# Altium PCB design4.PcbDoc
Units mm, origin at the board's own origin, x right, y up, seen from the top; angles counter-clockwise.
Board outline 22 x 100 mm, 2 copper layers (Top Layer, Bottom Layer); 53 components, 36 nets, 172 pads, 153 vias.
Unrouted connection lines stored in the file: 1.
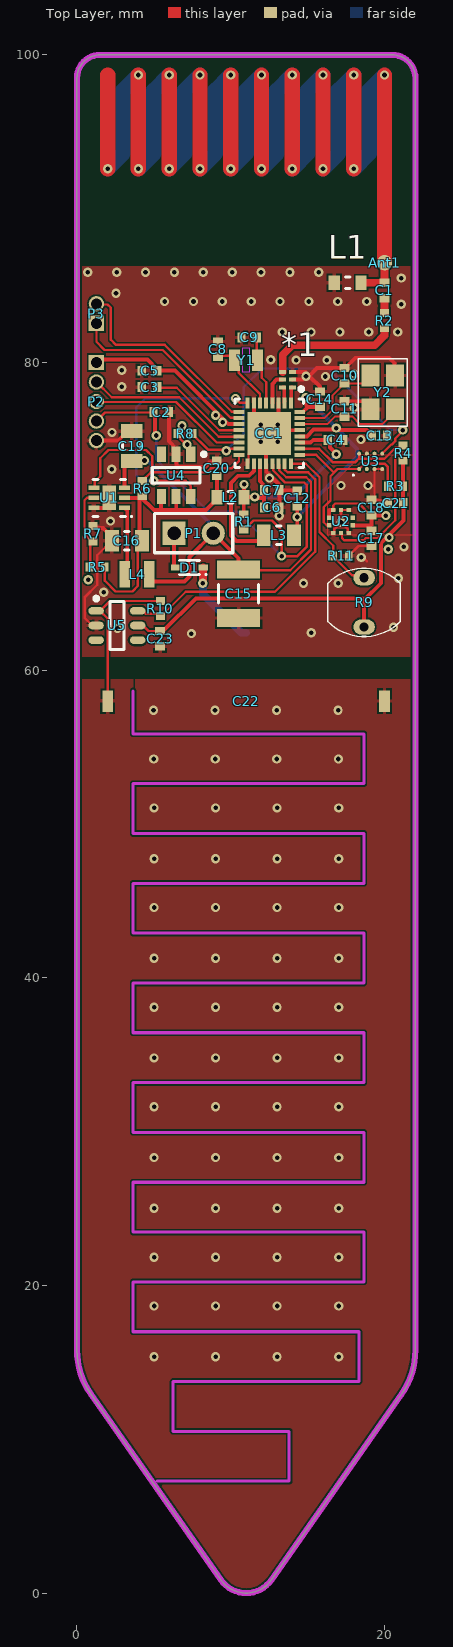
[diagram p0: Top Layer view]
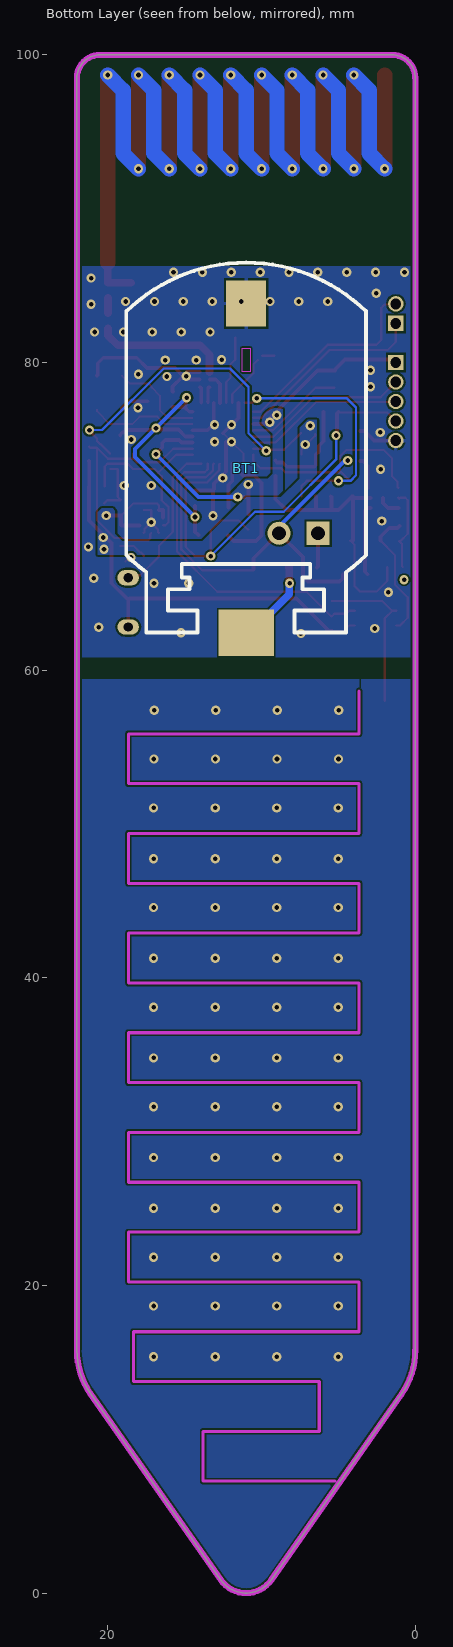
[diagram p1: Bottom Layer view, seen from below]
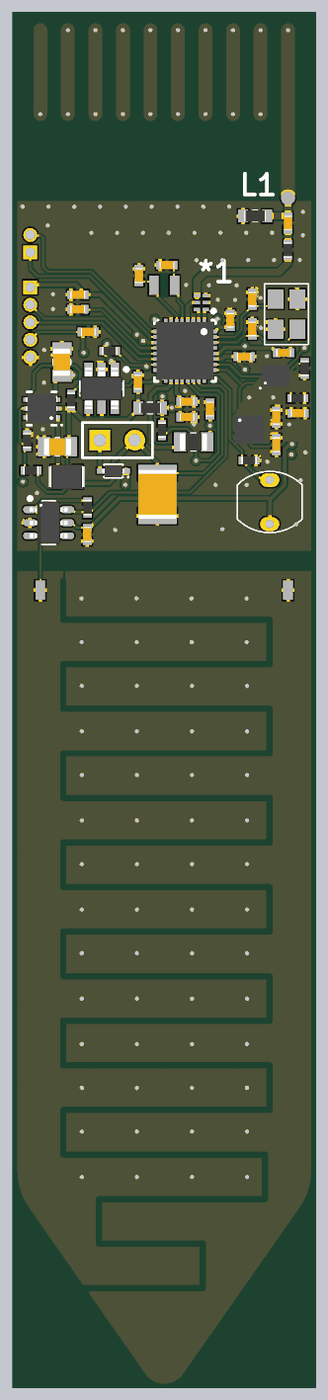
[diagram p2: 3D render of the assembled board from above, using the file's embedded part models]

## Layer stack, top to bottom
Top Solder: solder mask 0.0102, Solder Resist, Dk 3.5
Top Layer: signal copper 0.0356
Dielectric 1: dielectric 0.32, FR-4, Dk 4.8
Bottom Layer: signal copper 0.0356
Bottom Solder: solder mask 0.0102, Solder Resist, Dk 3.5

## Board outline
0.911,12.938 cw(c5.006,15.806) 0.006,15.806 0.006,98.506 cw(c1.506,98.506) 1.506,100.006 20.506,100.006 cw(c20.506,98.506) 22.006,98.506 22.006,15.806 cw(c17.006,15.806) 21.102,12.938 12.645,0.859 cw(c11.006,2.006) 9.368,0.859

## Design rules (kind name [scope] priority, off if disabled: settings)
Clearance [All] p1: gap=0.127 ignorepadtopadclearanceinfootprint=FALSE
DiffPairsRouting [All] p1: maxlimit=0.127 minlimit=0.127 mostfreqgap=0.127 toplayer_minwidth=0.218 toplayer_maxwidth=0.218 toplayer_prefwidth=0.218 bottomlayer_minwidth=0.218 bottomlayer_maxwidth=0.218 bottomlayer_prefwidth=0.218 maxuncoupledlength=12.7
Height Height_1 [InComponent('U2')] p1: minheight=0 maxheight=100 prefheight=12.7
Height [All] p2: minheight=0 maxheight=25.4 prefheight=12.7
HoleSize [All] p1: absolutevalues=TRUE maxlimit=2.54 minlimit=0.3 maxpercent=80.000 minpercent=20.000
MinimumSolderMaskSliver [All] p1: minsoldermaskwidth=0.127
PlaneClearance [All] p1: clearance=0.127
PlaneConnect [All] p1: planeconnectstyle=Direct reliefexpansion=0.508 reliefentries=4 reliefconductorwidth=0.254 reliefairgap=0.254
PolygonConnect [All] p1: thpad.connectstyle=Relief thpad.reliefconductorwidth=0.254 thpad.reliefentries=4 thpad.polygonreliefangle="90 Angle" thpad.airgapwidth=0.127 smdpad.connectstyle=Relief smdpad.reliefconductorwidth=0.254 smdpad.reliefentries=4 smdpad.polygonreliefangle="90 Angle" smdpad.airgapwidth=0.127 via.connectstyle=Direct via.reliefconductorwidth=0.254 via.reliefentries=4 via.polygonreliefangle="90 Angle" via.airgapwidth=0.254
RoutingVias [All] p1: holewidth=0.4 width=0.7 viastyle="Through Hole" minholewidth=0.3 minwidth=0.6 maxholewidth=0.5 maxwidth=0.8
SolderMaskExpansion [All] p1: expansion=0.127
Width Width_50ohm [InNet('Net*1_1') OR InNet('NetAnt1_1')] p1: maxlimit=1.27 minlimit=0.508 preferedwidth=0.508 minimp=50.000000 maximp=50.000000 favimp=50.000000
Width [All] p2: maxlimit=0.254 minlimit=0.127 preferedwidth=0.152 minimp=50.000000 maximp=50.000000 favimp=50.000000
24 further rules are at their usual default settings.

## Classes and differential pairs
differential pair RF: +RF_P -RF_N

## Components (designator, comment, footprint, x,y, rotation, side; value= is the part's Value field where it differs from the comment)
*1 "0850BM14E0016" 0850BM14E0016 14.021,78.392 r90 top
Ant1 "Antenna 868 Helix" ANTENNA_868_HELIX 20,86.5 r180 top locked
BT1 "Battery Coin Cell" S8421-45R 10.998,64 r180 bottom
C1 "Cap" "0402 (CAP)" 19.99,84.692 r90 top value=8.2pF
C2 "Cap" "0402 (CAP)" 5.486,76.784 r0 top value=100nF
C3 "Cap" "0402 (CAP)" 4.724,78.41 r0 top value=1uF
C4 "Cap" "0402 (CAP)" 16.815,74.981 r180 top value=100nF
C5 "Cap" "0402 (CAP)" 4.724,79.477 r0 top value=100nF
C6 "Cap" "0402 (CAP)" 12.662,70.591 r180 top value=22uF
C7 "Cap" "0402 (CAP)" 12.662,71.709 r180 top value=100nF
C8 "Cap" "0402 (CAP)" 9.169,80.874 r270 top value=12pF
C9 "Cap" "0402 (CAP)" 11.201,81.636 r0 top value=12pF
C10 "DNM" "0402 (CAP)" 17.399,79.146 r270 top value=12pF
C11 "DNM" "0402 (CAP)" 17.399,76.987 r270 top value=12pF
C12 "Cap" "0402 (CAP)" 14.326,71.171 r270 top value=22uF
C13 "Cap" "0402 (CAP)" 19.685,75.26 r180 top value=100nF
C14 "Cap" "0402 (CAP)" 15.799,77.622 r270 top value=100nF
C15 "GRM32EC70J107ME15L" "1210 (CAP)" 10.516,64.973 r90 top value=100uF
C16 "Cap" "0805 (CAP)" 3.251,68.428 r0 top value=22uF
C17 "Cap" "0402 (CAP)" 19.152,68.58 r90 top value=100nF
C18 "Cap" "0402 (CAP)" 19.152,70.579 r270 top value=100nF
C19 "Cap" "0805 (CAP)" 3.556,74.574 r270 top value=10uF
C20 "Cap" "0402 (CAP)" 9.093,73.127 r270 top value=1uF
C21 "Cap" "0402 (CAP)" 20.721,70.866 r0 top value=100nF
C22 "Chumidity" SOIL_CAP 11,17 r0 top locked value=1pF
C23 "Cap" "0402 (CAP)" 5.41,62.052 r90 top value=100nF
CC1 "CC1310F32RSMR" CC1310F32RSMR 12.506,75.406 r270 top
D1 "RB751S40T5G" SOD-523 7.315,66.675 r180 top
L1 "Inductor" "0603 (IND)" 17.602,85.192 r180 top value=68nH
L2 "BLM18HE152SN1D" "0603 (IND)" 9.982,71.247 r0 top value="1500 Ohm"
L3 "MLZ2012N6R8LT000" "0805 (IND)" 13.132,68.783 r0 top value=6.8uH
L4 "Inductor" SRN2009T 3.912,66.243 r180 top value=3.3uH
P1 "Header 2" HDR1X2 6.325,68.91 r0 top
P2 "Header 5" 5pin-1.27 1.27,77.47 r270 top
P3 "Header 2" 2pin-1.27 1.27,83.185 r90 top
R1 "Res1" "0402 (RES)" 10.846,69.647 r90 top value=100K
R2 "" "0402 (RES)" 19.99,82.728 r90 top value=0
R3 "Res1" "0402 (RES)" 20.701,71.958 r0 top value=4.7K
R4 "Res1" "0402 (RES)" 21.209,74.117 r270 top value=4.7K
R5 "DNM" "0402 (RES)" 1.321,66.713 r180 top value=0
R6 "Res1" "0402 (RES)" 4.242,71.806 r90 top value=10K
R7 "DNM" "0402 (RES)" 1.041,68.877 r90 top value=0
R8 "Res1" "0402 (RES)" 7.036,75.387 r0 top value=4.7K
R9 "200K - 10K" Photoresistor 18.669,64.414 r90 top
R10 "Rcharge" "0402 (RES)" 5.43,64.008 r270 top value=1k
R11 "Res1" "0402 (RES)" 17.17,67.437 r180 top value=4.7K
U1 "TPS61291" TPS61291 2.1,71.206 r180 top
U2 "BMP388, Pressure sensor" BMP388 17.17,69.672 r90 top
U3 "HDC1010, Humidity, Temp" HDC1010 19.101,73.584 r90 top
U4 "TPS22860" SOT23-5 6.452,72.669 r270 top
U5 "74LVC2G14, Inverting Schmitt Trigger" 74LVC2G14 2.603,62.912 r0 top
Y1 "32.768 kHz" "FC-12M 32.7680KA-A3" 10.998,80.162 r0 top
Y2 "TSX-3225 24.0000MF20G-AC3" "TSX-3225 24.0000MF20G-AC3" 19.886,78.062 r270 top

## Footprints (in the part's own frame and the unit in brackets; to place one, negate y for a bottom-side part, rotate by r counter-clockwise, add the part's x,y. Pads: shape width x height; smd on the part's side, far side on the other; paste and mask are expansions set on the pad)
2pin-1.27 [mm]
  rect 1x1 hole 0.7: 1(-0.635,0)
  round 1 hole 0.7: 2(0.635,0)
5pin-1.27 [mm]
  rect 1x1 hole 0.7: 1(-2.54,0)
  round 1 hole 0.7: 2(-1.27,0) 3(0,0) 4(1.27,0) 5(2.54,0)
74LVC2G14 [mm] "TSOP, 6-Leads, Body 2,90x1,50mm, Pitch 0,95mm, IPC Medium Density"
  oval 1x0.5 smd: 1(-1.35,0.95) 2(-1.35,0) 3(-1.35,-0.95) 4(1.35,-0.95) 5(1.35,0) 6(1.35,0.95)
  silkscreen extent -1.47,-1.55 0.45,1.87, body extent -1.38,-1.55 1.38,1.55, height 1.1
"0402 (CAP)" [mm] "Chip Capacitor, 2-Leads, Body 1,60x0,80mm, IPC Medium Density"
  rect 0.54x0.64 smd: 1(-0.5,0) 2(0.5,0)
  body extent -0.55,-0.3 0.55,0.3, height 0.4
"0402 (RES)" [mm] "Chip Resistor, 2-Leads, Body 1,00x0,50mm, IPC Medium Density"
  rect 0.5x0.6 smd: 1(-0.5,0) 2(0.5,0)
  body extent -0.55,-0.3 0.55,0.3, height 0.4
"0603 (IND)" [mm]
  rect 0.72x0.94 smd: 1(-0.87,0) 2(0.87,0)
  silkscreen extent -0.15,-0.37 0.15,0.37, body extent -0.8,-0.4 0.8,0.4, height 0.6
"0805 (CAP)" [mm] "Chip Capacitor, 2-Leads, Body 2,00x1,25mm, IPC Medium Density"
  rect 0.9x1.4 smd: 1(-0.975,0) 2(0.975,0)
  silkscreen extent -0.15,-0.6 0.15,0.6, body extent -1,-0.63 1,0.63, height 0.6
"0805 (IND)" [mm] "Chip Inductor, 2-Leads, Body 2,00x1,25mm, IPC Medium Density"
  rect 0.9x1.39 smd: 1(-0.98,0) 2(0.98,0)
  silkscreen extent -0.15,-0.6 0.15,0.6, body extent -1,-0.63 1,0.63, height 0.6
0850BM14E0016 [mm]
  rect 0.25x0.45 smd: 1(1,0.65) 2(0.5,0.65) 3(0,0.65) 4(0,0) 5(0.5,0) 6(1,0)
"1210 (CAP)" [mm] "Chip Capacitor, 2-Leads, Body 3,20x2,50mm, IPC Medium Density"
  rect 1.15x2.8 smd: 1(-1.575,0) 2(1.575,0)
  silkscreen extent -0.6,-1.3 0.6,1.3, body extent -1.8,-1.4 1.8,1.4, height 2.8
ANTENNA_868_HELIX [mm]
  round 1 smd: 1(0,0)
  Top Layer lines w1: 18,-6.1 18,-12.2 ; 16,-6.1 16,-12.2 ; 14,-6.1 14,-12.2 ; 12,-6.1 12,-12.2 ; 10,-6.1 10,-12.2 ; 8,-6.1 8,-12.2 ; 6,-6.1 6,-12.2 ; 4,-6.1 4,-12.2 ; 2,-6.1 2,-12.2 ; 0,0 0,-12.2
  Bottom Layer lines w1: 18,-6.1 17,-7.1 17,-11.2 16,-12.2 ; 16,-6.1 15,-7.1 15,-11.2 14,-12.2 ; 14,-6.1 13,-7.1 13,-11.2 12,-12.2 ; 12,-6.1 11,-7.1 11,-11.2 10,-12.2 ; 10,-6.1 9,-7.1 9,-11.2 8,-12.2 ; 8,-6.1 7,-7.1 7,-11.2 6,-12.2 ; 6,-6.1 5,-7.1 5,-11.2 4,-12.2 ; 4,-6.1 3,-7.1 3,-11.2 2,-12.2 ; 2,-6.1 1,-7.1 1,-11.2 0,-12.2
BMP388 [mm] "LGA, 10-Leads, Body 2,00x2,00mmx0,80mm, Pitch 0,50mm"
  rect 0.275x0.275 smd: 1(0.25,0.762) 2(-0.25,0.762) 3(-0.75,0.5) 4(-0.75,0) 5(-0.75,-0.5) 6(-0.25,-0.763) 7(0.25,-0.763) 8(0.75,-0.5) 9(0.75,0) 10(0.75,0.5)
  body extent -1.02,-1.03 1.65,1.02, height 30
CC1310F32RSMR [mm] "QFN, 32-Leads, Body 4,00x4,00mm, Pitch 0,40mm, Thermal Pad 2,80x2,80mm, IPC Medium Density"
  rect 0.7x0.26 smd: 1(-1.975,1.4) 2(-1.975,1) 3(-1.975,0.6) 4(-1.975,0.2) 5(-1.975,-0.2) 6(-1.975,-0.6) 7(-1.975,-1) 8(-1.975,-1.4) 17(1.975,-1.4) 18(1.975,-1) 19(1.975,-0.6) 20(1.975,-0.2) 21(1.975,0.2) 22(1.975,0.6) 23(1.975,1) 24(1.975,1.4)
  rect 0.26x0.7 smd: 9(-1.4,-1.975) 10(-1,-1.975) 11(-0.6,-1.975) 12(-0.2,-1.975) 13(0.2,-1.975) 14(0.6,-1.975) 15(1,-1.975) 16(1.4,-1.975) 25(1.4,1.975) 26(1,1.975) 27(0.6,1.975) 28(0.2,1.975) 29(-0.2,1.975) 30(-0.6,1.975) 31(-1,1.975) 32(-1.4,1.975)
  rect 2.8x2.8 smd: 33(0,0)
  silkscreen extent -3,-2.22 2.22,2.22, body extent -2.08,-2.08 2.08,2.08, height 1
"FC-12M 32.7680KA-A3" [mm]
  rect 0.7x1.4 smd: 1(-0.75,0) 2(0.75,0)
  Keep-Out Layer region: -0.254,-0.762 0.254,-0.762 0.254,0.762 -0.254,0.762
HDC1010 [mm] "BGA, 8-Leads, Body 1,59x2,04mmx0,68mm, Pitch 0,50mm"
  round 0.26 smd: A1(-0.5,0.75) A2(0.5,0.75) B1(-0.5,0.25) B2(0.5,0.25) C1(-0.5,-0.25) C2(0.5,-0.25) D1(-0.5,-0.75) D2(0.5,-0.75)
  silkscreen extent -0.95,1.08 -0.85,1.17, body extent -0.79,-1.02 0.79,1.02, height 0.67
HDR1X2 [mm] "Connector; Header; 2 Position"
  rect 1.5x1.5 hole 0.9: 1(0,0)
  round 1.5 hole 0.9: 2(2.54,0)
  silkscreen extent -1.27,-1.27 3.81,1.27
Photoresistor [mm]
  oval 1x1.4 hole 0.6: 1(-1.6,0) 2(1.6,0)
  silkscreen extent -2.22,-2.35 2.22,2.35
S8421-45R [mm]
  rect 3.6x3 smd: 1(0,-1.556)
  rect 2.6x3 smd: 2(0,19.844)
  silkscreen extent -7.8,-1.56 7.8,22.5
SOD-523 [mm] "Molded Diode, 2-Leads, Body 1,20x0,80mm, IPC Medium Density"
  rect 0.6x0.4 smd: 1(-0.9,0) 2(0.9,0)
  silkscreen extent -1.12,-0.45 0.65,0.5, body extent -0.87,-0.45 0.87,0.45, height 0.7
SOIL_CAP [mm]
  rect 0.7x1.4 smd: 1(-9,41) 2(9,41)
  Keep-Out Layer lines w0.2: -7.339,41.656 -7.339,38.867 7.661,38.867 7.661,35.628 -7.339,35.628 -7.339,32.389 7.661,32.389 7.661,29.15 -7.339,29.15 -7.339,25.911 7.661,25.911 7.661,22.672 -7.339,22.672 -7.339,19.434 7.661,19.434 7.661,16.195 -7.339,16.195 -7.339,12.956 7.661,12.956 7.661,9.717 -7.339,9.717 -7.339,6.478 7.661,6.478 7.661,3.239 -7.339,3.239 -7.339,0 7.339,0 7.339,-3.239 -4.749,-3.239 -4.749,-6.478 2.803,-6.478 2.803,-9.717 -5.777,-9.717
SOT23-5 [mm] "SOT23, 5-Leads, Body 2,90x2,80mm, Pitch 0,95mm, IPC Medium Density"
  rect 1x0.6 smd: 1(-1.375,0.95) 2(-1.375,0) 3(-1.375,-0.95) 4(1.375,-0.95) 5(1.375,0) 6(1.375,0.95)
  silkscreen extent -1.5,-1.55 0.5,1.93, body extent -1.5,-1.53 1.5,1.53, height 1.45
SRN2009T [mm] "Molded Inductor, 2-Leads, Body 2,00x1,60mm, IPC Medium Density"
  rect 0.7x1.7 smd: 1(-0.8,0) 2(0.8,0)
  body extent -1.32,-0.9 1.32,0.9, height 0.95
TPS61291 [mm] "SON, 6-Leads, Body 2,00x2,00mm, Pitch 0,65mm, Thermal Pad 1,60x0,89mm, IPC Medium Density"
  rect 0.7x0.3 smd: 1(-0.995,0.65) 2(-0.995,0) 3(-0.995,-0.65) 4(0.995,-0.65) 5(0.995,0) 6(0.995,0.65)
  rect 0.89x1.6 smd: 7(0,0)
  silkscreen extent -1.5,-1.2 1.05,1.25, body extent -1.13,-1.05 1.13,1.05, height 0.8
"TSX-3225 24.0000MF20G-AC3" [mm]
  rect 1.4x1.15 smd: 1(-1.1,-0.8) 2(1.1,-0.8) 3(1.1,0.8) 4(-1.1,0.8)
  silkscreen extent -2.2,-1.6 2.2,1.6

## Part data
C1 C2 C3 C4 C5 C6 C7 C8 C9 C12 C13 C14 C16 C17 C18 C19 C20 C21 C23: "Capacitor", LatestRevisionDate=17-Jul-2002, LatestRevisionNote="Re-released for DXP Platform.", PackageDescription="Radial Cap, Thru-Hole; 2 Leads; 0.3 in Pin Spacing", PackageReference=RAD-0.3, Published=8-Jun-2000, Publisher="Altium Limited"
C10 C11 C15 C22: library part Cap, "Capacitor", LatestRevisionDate=17-Jul-2002, LatestRevisionNote="Re-released for DXP Platform.", PackageDescription="Radial Cap, Thru-Hole; 2 Leads; 0.3 in Pin Spacing", PackageReference=RAD-0.3, Published=8-Jun-2000, Publisher="Altium Limited"
D1: library part "D Schottky", "Schottky Diode", Code_JEDEC=DO-214-AA, LatestRevisionDate=17-Jul-2002, LatestRevisionNote="Re-released for DXP Platform.", PackageDescription="DO-214-AA/SMB; 2 C-Bend Leads; Body 5.3 x 3.6 mm, inc. leads (LxW)", PackageReference=SMB, Published=8-Jun-2000, Publisher="Altium Limited"
L2: library part "Inductor Iron", "Magnetic-Core Inductor", LatestRevisionDate=17-Jul-2002, LatestRevisionNote="Re-released for DXP Platform.", PackageDescription="Axial Device, Thru-Hole; 2 Leads; 0.9 in Pin Spacing", PackageReference=AXIAL-0.9, Published=24-Mar-1999, Publisher="Altium Limited"
L3: library part Inductor, "Inductor", Code_IEC=1005, Code_JEITA=0402, LatestRevisionDate=29-May-2009, LatestRevisionNote="IPC-7351 Footprint Added.", PackageDescription="Chip Inductor", PackageReference=0402-A, Published=8-Jun-2000, Publisher="Altium Limited"
P1 P3: "Header, 2-Pin", LatestRevisionDate=17-Jul-2002, LatestRevisionNote="Re-released for DXP Platform.", Publisher="Altium Limited"
P2: "Header, 5-Pin", LatestRevisionDate=17-Jul-2002, LatestRevisionNote="Re-released for DXP Platform.", Publisher="Altium Limited"
R1 R3 R4 R6 R8 R11: "Resistor", LatestRevisionDate=17-Jul-2002, LatestRevisionNote="Re-released for DXP Platform.", PackageDescription="Axial Device, Thru-Hole; 2 Leads; 0.3 in Pin Spacing", PackageReference=AXIAL-0.3, Published=8-Jun-2000, Publisher="Altium Limited"
R2 R5 R7 R10: library part Res1, "Resistor", LatestRevisionDate=17-Jul-2002, LatestRevisionNote="Re-released for DXP Platform.", PackageDescription="Axial Device, Thru-Hole; 2 Leads; 0.3 in Pin Spacing", PackageReference=AXIAL-0.3, Published=8-Jun-2000, Publisher="Altium Limited"
R9: library part "Photo Resistor"
U2: library part BMP388
U3: library part HDC1010
U5: library part 74LVC2G14
Y1: library part XTAL, "Crystal Oscillator", LatestRevisionDate=17-Jul-2002, LatestRevisionNote="Re-released for DXP Platform.", PackageDescription="Crystal, Thru-Hole; 2 Leads; Body 3.1 x 8.2 mm (Dia.xH)", PackageReference=R38, Published=8-Jun-2000, Publisher="Altium Limited"
Y2: library part Crystal
L1 L4: Code_IEC=1005, Code_JEITA=0402, LatestRevisionDate=29-May-2009, LatestRevisionNote="IPC-7351 Footprint Added.", PackageDescription="Chip Inductor", PackageReference=0402-A, Published=8-Jun-2000, Publisher="Altium Limited"

## Via types
v1: diameter 0.6, hole 0.3, Top Layer to Bottom Layer, tented both sides, 153 vias

## Nets (pads, with @x,y where several pads share a name; then routed paths per layer and width w, separated by ;. In a path a pad name is that pad's centre, name@x,y a point inside that pad or via, vN(x,y) a via of type N, cw(c..) or ccw(c..) an arc to the next point about the centre after c; other vN are vias at no path point)
BMP_INT: U2.7
DCDC_SW: CC1.18 L3.1 | length 8.2
  Top Layer w0.254: CC1.18 11.503,73.428 11.503,72.946 11.201,72.644 10.465,72.644 10.008,72.187 10.008,68.758 10.363,68.402 11.827,68.402 L3.1@12.183,68.758
DRDYn: CC1.15 R8.2 U3.D2 | length 22.8
  Top Layer w0.152: R8.2@7.438,75.434 8.526,74.346 9.627,74.346 v1(9.703,74.27) 9.84,74.406 CC1.15 ; U3.D2 20.443,74.676 20.478,74.676 20.701,74.899 20.701,75.067 21.184,75.55 v1(21.184,75.616)
  Bottom Layer w0.152: v1(9.703,74.27) 10.846,75.413 10.846,78.41 12.058,79.622 16.364,79.622 20.371,75.616 v1(21.184,75.616)
EN_BYP: CC1.16 R6.2 U1.4 | length 14.2
  Top Layer w0.152: U1.4 1.16,71.91 1.16,72.256 1.524,72.619 1.524,73.787 2.057,74.32 4.496,74.32 4.902,73.915 4.902,72.966 4.809,72.873 ; R6.2 4.809,72.873 ; CC1.16 10.541,73.997 10.541,73.609 10.058,73.127 8.712,73.127 8.458,72.873 4.809,72.873
GND: *1.5 *1.6 BT1.2 C2.2 C3.1 C4.1 C5.1 C6.1 C7.1 C8.1 C9.1 C10.1 C11.1 C12.1 C13.1 C14.1 C15.1 C16.1 C17.1 C18.1 C19.1 C20.1 C21.1 C22.2 C23.1 CC1.3 CC1.7 CC1.17 CC1.20 CC1.29 CC1.33 L1.2 P2.5 R7.2 R11.1 U1.6 U1.7 U2.3 U2.5 U2.8 U2.9 U3.B2 U3.C1 U3.D1 U4.2 U5.2 Y2.2 Y2.4 | length 55.3
  Top Layer w0.127: CC1.17 11.17,73.495 11.17,74.07 v1(11.956,74.856) CC1.33
  Top Layer w0.152: U5.2 1.003,62.912 0.503,63.412 0.503,64.739 1.321,65.557 1.321,67.472 C16.1 ; U2.3 16.732,68.983 16.732,69.157 17.17,69.596 v1(17.17,69.621) ; R11.1 17.67,67.487 17.844,67.661 17.894,67.661 18.313,68.08 C17.1 C17.1@19.202,68.08 ; U2.5 17.609,68.983 17.609,69.183 v1(17.17,69.621) ; U2.8 U2.9 v1(17.17,69.621) ; v1(18.491,67.335) 18.597,67.335 18.851,67.081 ; v1(18.923,72.009) 18.93,72.002 19.351,72.002 ; U3.D1 U3.C1 19.351,72.002 ; C21.1 20.027,71.06 19.17,71.06 C18.1 19.157,71.079 19.351,71.272 19.351,72.002
  Top Layer w0.254: R7.2 1.164,69.254 1.7,69.254 2.276,68.678 C16.1 ; U1.6 1.782,70.556 2.1,70.874 U1.7 ; P2.5 2.687,74.93 3.306,75.549 C19.1 ; C2.2 5.986,74.887 6.279,74.595 6.279,74.217 U4.2 6.477,74.019 6.477,73.355 6.604,73.228 8.331,73.228 8.622,73.519 8.986,73.519 C20.1 ; CC1.7 11.506,76.406 v1(11.956,75.956) CC1.33 ; CC1.33@12.306,74.856 CC1.20 12.309,73.428 12.309,72.908 13.085,72.132 13.085,71.786 C7.1 ; CC1.3 13.106,76.006 13.506,75.606 CC1.29 ; v1@13.161,70.05 C6.1 ; C6.1 C7.1 ; *1.5 14.681,78.892 v1(14.898,79.109) ; *1.6 v1@14.867,79.392 ; C12.1 14.306,71.69 13.181,71.69 C7.1 ; C14.1 15.749,78.122 15.799,78.172 15.799,78.435 15.125,79.109 v1(14.898,79.109) ; C11.1 18.638,77.487 19.086,77.039 Y2.2 ; Y2.4 20.65,79.198 20.65,79.959 20.295,80.315 18.117,80.315 17.449,79.646 C10.1 15.613,79.646 15.076,79.109 v1(14.898,79.109)
  other v1: 5.018,18.669 9.018,18.669 13.018,18.669 17.018,18.669 5.018,25.019 9.018,25.019 13.018,25.019 17.018,25.019 5.018,31.623 9.018,31.623 13.018,31.623 17.018,31.623 5.018,38.1 9.018,38.1 13.018,38.1 17.018,38.1 5.018,44.577 9.018,44.577 13.018,44.577 17.018,44.577 5.018,51.054 9.018,51.054 13.018,51.054 17.018,51.054 4.982,57.404 8.982,57.404 12.982,57.404 16.982,57.404 7.442,62.382 15.23,62.444 2.642,62.713 20.583,62.797 1.753,65.075 14.732,65.651 16.993,65.659 20.904,65.989 21.26,68.021 2.184,69.698 13.16,70.049 17.17,72.009 12.522,72.492 2.261,73.076 13.056,74.856 18.466,75.006 2.286,75.463 13.056,75.956 18.034,77.064 2.921,78.435 16.154,79.096 18.009,79.248 2.921,79.502 14.249,80.162 16.256,80.162 12.598,80.188 13.348,81.991 15.224,81.991 17.101,81.991 18.977,81.991 20.853,81.991 21.082,83.795 5.702,83.972 7.579,83.972 9.455,83.972 11.332,83.972 13.208,83.972 15.084,83.972 16.961,83.972 18.837,83.972 2.54,84.506 21.082,85.496 0.711,85.877 2.588,85.877 4.464,85.877 6.34,85.877 8.217,85.877 10.093,85.877 11.97,85.877 13.846,85.877 15.723,85.877
JTAG_TCK: CC1.14 P2.3 | length 10.4
  Top Layer w0.152: P2.3 1.295,77.445 6.452,77.445 9.09,74.806 CC1.14
JTAG_TMS: CC1.13 P2.2 | length 10.7
  Top Layer w0.152: P2.2 2.261,77.749 6.655,77.749 9.22,75.184 10.509,75.184 CC1.13
Net*1_1: *1.1 R2.1 | length 8.7
  Top Layer w0.508: *1.1@13.379,79.4 13.379,80.511 13.995,81.128 19.355,81.128 19.99,81.763 R2.1
Net*1_2: *1.2 CC1.4 | length 2
  Top Layer w0.254: CC1.4@12.707,77.364 12.707,78.62 12.977,78.89 13.369,78.89 *1.2
NetAnt1_1: Ant1.1 C1.2 L1.1 | length 2.8
  Top Layer w0.508: L1.1 C1.2 19.995,85.197 19.995,86.495 Ant1.1
  other v1: 2,92.6 4,92.6 6,92.6 8,92.6 10,92.6 12,92.6 14,92.6 16,92.6 18,92.6 4,98.7 6,98.7 8,98.7 10,98.7 12,98.7 14,98.7 16,98.7 18,98.7 20,98.7
NetBT1_1: BT1.1 D1.1 | length 5.6
  Top Layer w0.508: v1(8.179,65.659) 8.196,65.677 8.196,66.656 D1.1
  Bottom Layer w0.508: v1(8.179,65.659) 8.196,65.641 8.196,64.946 10.698,62.444 BT1.1
NetC1_1: C1.1 R2.2 | length 1
  Top Layer w0.508: R2.2 C1.1
NetC3_2: C3.2 CC1.12 | length 6.4
  Top Layer w0.152: C3.2@5.274,78.371 6.49,78.371 9.255,75.606 CC1.12
NetC8_2: C8.2 CC1.6 Y1.1 | length 4.3
  Top Layer w0.152: C8.2@9.169,80.436 Y1.1@9.974,80.436 ; Y1.1 10.522,79.889 10.522,79.335 11.906,77.951 CC1.6
NetC9_2: C9.2 CC1.5 Y1.2 | length 4.5
  Top Layer w0.152: C9.2 11.701,80.209 Y1.2 12.022,79.889 12.022,79.012 12.306,78.727 CC1.5
NetC10_2: C10.2 CC1.31 Y2.1 | length 6.3
  Top Layer w0.127: CC1.31 16.107,76.406 16.612,76.911 16.612,77.859 17.142,78.39 17.142,78.44 17.349,78.646 C10.2 17.403,78.651 18.574,78.651 Y2.1
NetC11_2: C11.2 CC1.30 Y2.3 | length 7.1
  Top Layer w0.127: CC1.30 16.291,76.006 16.772,76.487 C11.2 17.924,76.487 18.405,76.006 19.855,76.006 20.686,76.837 Y2.3
NetC22_1: C22.1 R10.1 U5.1 | length 10.5
  Top Layer w0.152: U5.1 U5.1@1.503,63.862 ; C22.1 2,63.365 U5.1@1.503,63.862 ; R10.1 2.149,64.508 U5.1@1.503,63.862
  other v1: 5.018,15.367 9.018,15.367 13.018,15.367 17.018,15.367 5.018,21.844 9.018,21.844 13.018,21.844 17.018,21.844 5.018,28.321 9.018,28.321 13.018,28.321 17.018,28.321 5.018,34.798 9.018,34.798 13.018,34.798 17.018,34.798 5.018,41.275 9.018,41.275 13.018,41.275 17.018,41.275 5.018,47.752 9.018,47.752 13.018,47.752 17.018,47.752 5,54.229 9,54.229 13,54.229 17,54.229
NetCC1_24: CC1.24 R9.2 R11.2 | length 10.3
  Top Layer w0.152: CC1.24 14.884,73.431 15.773,72.542 15.773,68.986 16.67,68.089 R11.2 16.67,67.387 17.881,66.177 18.507,66.177 R9.2
NetD1_2: D1.2 P1.1 | length 2.3
  Top Layer w0.254: P1.1 6.325,66.748 6.398,66.675 D1.2
NetL4_2: L4.2 U1.1 | length 4.6
  Top Layer w0.254: U1.1@2.917,70.556 U1.1 3.276,70.375 3.276,66.407 L4.2
NetR5_2: R5.2 R7.1 U1.5 | length 5.3
  Top Layer w0.152: R5.2 0.868,66.76 0.868,68.203 R7.1 0.991,68.377 0.495,68.873 0.495,71.056 0.66,71.222 U1.5@0.965,71.222 ; U1.5@1.031,71.132 U1.5
PWR_ON: CC1.8 U4.6 | length 16.5
  Top Layer w0.152: v1(5.001,72.314) 7.069,72.314 7.402,71.981 U4.6 ; v1(10.312,77.673) 10.604,77.381 CC1.8
  Bottom Layer w0.152: v1(5.001,72.314) 4.224,72.314 3.861,72.677 3.861,77.089 4.445,77.673 v1(10.312,77.673)
RESET_N: C2.1 CC1.21 P2.4 R1.1 | length 31.4
  Top Layer w0.152: P2.4 1.829,76.759 4.961,76.759 C2.1 ; R1.1 10.896,69.147 11.482,69.733 12.677,69.733 13.31,69.1 v1(13.31,67.423) 14.337,67.423 14.935,68.021 14.935,72.06 14.783,72.212 13.538,72.212 12.76,72.99 12.76,73.378 CC1.21
  Top Layer w0.254: C2.1 5.09,76.681 5.09,75.326 v1(5.156,75.26)
  Bottom Layer w0.152: v1(5.156,75.26) 5.156,73.711 8.56,70.307 10.426,70.307 v1(13.31,67.423)
RF_N: *1.3 CC1.2 | length 1.1
  Top Layer w0.218: *1.3 13.47,78.392 13.486,78.376 CC1.2@13.486,77.385 ; CC1.2@13.486,77.512 CC1.2@13.507,77.491
RF_P: *1.4 CC1.1 | length 1.1
  Top Layer w0.218: CC1.1@13.907,77.491 CC1.1@13.928,77.512 ; CC1.1@13.928,77.385 13.928,78.376 13.944,78.392 *1.4
SCL: CC1.25 R3.1 U2.2 U3.A1 | length 11.7
  Top Layer w0.152: CC1.25 15.554,74.006 16.713,72.847 16.485,72.619 16.485,71.044 16.053,70.612 16.053,69.621 16.252,69.422 U2.2 ; 16.755,72.889 16.95,73.084 U3.A1 18.684,73.417 20.03,73.417 20.201,73.246 R3.1
SDA: CC1.26 R4.1 U2.4 U3.A2 | length 17
  Top Layer w0.152: CC1.26 15.748,74.406 16.621,73.533 18.109,73.533 18.327,73.751 ; U2.4 17.232,68.861 17.232,68.593 17.372,68.453 18.647,68.453 18.798,68.604 19.553,68.604 20.701,69.752 20.701,74.463 20.704,74.466 ; U3.A2 18.351,73.775 18.327,73.751 ; R4.1@21.209,74.524 21.151,74.466 20.704,74.466 ; 18.327,73.751 19.989,73.751 20.704,74.466
SOIL_HUMIDITY: CC1.23 R10.2 U5.6 | length 20.8
  Top Layer w0.152: U5.6 4.297,63.862 4.477,63.682 5.256,63.682 R10.2 5.48,63.508 7.072,65.1 12.878,65.1 15.494,67.716 15.494,72.409 15.03,72.873 13.691,72.873 13.506,73.057 CC1.23
UART_RX: CC1.9 P3.2 | length 13.4
  Top Layer w0.152: P3.2 1.313,83.777 1.999,83.777 2.21,83.566 2.21,81.483 2.54,81.153 5.715,81.153 10.062,76.806 CC1.9
UART_TX: CC1.10 P3.1 | length 12.5
  Top Layer w0.152: P3.1 1.27,81.356 1.803,80.823 5.588,80.823 10.004,76.406 CC1.10
V_switch: C17.2 C18.2 C21.2 C23.2 R3.2 R4.2 R8.1 R9.1 U2.1 U2.6 U2.10 U3.B1 U4.1 U5.5 | length 36.1
  Top Layer w0.152: U5.5 4.297,62.912 4.656,62.552 C23.2 ; R8.1@6.506,75.358 6.506,75.256 7.402,74.36 U4.1 ; U2.10 16.67,70.711 16.8,70.841 18.34,70.841 19.102,70.079 C18.2
  Top Layer w0.254: C23.2 5.605,62.552 7.732,64.679 18.565,64.679 18.651,64.592 ; U2.1 16.408,70.422 U2.10 ; U2.6 19.125,69.422 19.152,69.449 C18.2 19.164,70.066 20.079,70.066 v1(20.091,70.053) ; R9.1 18.669,64.574 18.651,64.592 ; R4.2 21.201,73.617 R3.2 21.211,71.948 21.211,70.876 C21.2 21.221,69.735 19.762,68.276 19.762,65.66 18.694,64.592 18.651,64.592
  other v1: 20.244,67.869 20.295,68.631 7.163,74.676 6.833,75.895
Vbat: C15.2 C19.2 CC1.22 L4.1 P1.2 U1.3 | length 30.8
  Top Layer w0.152: C15.2 10.567,66.497 13.868,66.497 15.215,67.843 15.215,72.238 14.91,72.542 13.614,72.542 13.16,72.997 13.16,73.378 CC1.22
  Top Layer w0.254: U1.3 3.095,73.276 3.418,73.599 C19.2 ; L4.1 4.712,65.984 4.935,65.761 6.985,65.761 7.315,66.091 7.315,67.361 P1.2 8.89,68.91 10.516,67.285 C15.2
  Bottom Layer w0.254: v1(4.394,73.635) 4.572,73.635 8.865,69.342 P1.2
VCC: C16.2 C20.2 L2.1 R5.1 R6.1 U1.2 U4.4 U4.5 | length 19.6
  Top Layer w0.152: R5.1 1.821,65.819 2.515,65.126 3.607,65.126 3.962,65.481 3.962,68.164 C16.2
  Top Layer w0.254: U1.2@2.917,71.206 U1.2 3.964,71.206 R6.1@4.064,71.306 ; C16.2@4.044,68.431 4.064,68.451 R6.1@4.064,71.306 ; U4.4 5.467,71.26 5.467,70.409 ; U4.5 6.461,71.285 6.461,70.409 ; C20.2 9.103,72.617 9.103,71.256 L2.1 9.112,71.137 8.384,70.409 6.461,70.409 ; R6.1@4.064,71.306 4.114,71.306 5.011,70.409 5.467,70.409 ; 5.467,70.409 6.461,70.409
VDDR: C12.2 C13.2 C14.2 CC1.28 CC1.32 L3.2 | length 20
  Top Layer w0.254: L3.2 14.326,68.997 v1(14.326,69.965) C12.2 ; CC1.28 14.484,75.209 14.961,75.209 15.392,75.641 16.764,75.641 v1(16.866,75.743) 16.993,75.616 18.829,75.616 18.992,75.453 19.042,75.453 19.185,75.31 C13.2 ; CC1.32 14.701,76.806 15.017,77.122 ; v1(14.872,77.724) 14.938,77.658 14.938,77.202 15.017,77.122 ; C14.2 15.017,77.122
  Bottom Layer w0.254: v1(14.326,69.965) 18.221,73.86 18.221,74.388 v1(16.866,75.743) 14.884,77.724 v1(14.872,77.724)
VDDS: C4.2 C5.2 C6.2 C7.2 CC1.11 CC1.19 CC1.27 L2.2 P2.1 R1.2 | length 26.9
  Top Layer w0.254: P2.1 1.463,80.203 4.582,80.203 5.224,79.561 C5.2 6.375,79.477 9.843,76.009 10.528,76.009 CC1.11 ; R1.2 10.849,70.15 10.849,71.244 L2.2 L2.2@10.862,71.257 ; v1(10.871,72.085) 10.862,72.076 L2.2@10.862,71.257 ; CC1.19 11.906,72.295 12.141,72.06 12.141,71.73 C7.2 12.162,71.209 ; C6.2 12.162,71.209 ; CC1.27 14.484,74.809 15.196,74.809 15.367,74.981 16.265,74.981 16.459,74.786 16.459,74.472 16.866,74.066 v1(16.866,74.041) ; L2.2@10.862,71.257 10.878,71.272 v1(11.555,71.272) 11.619,71.209 12.162,71.209
  Bottom Layer w0.254: v1(11.555,71.272) 14.097,71.272 v1(16.866,74.041)
  other v1: 9.474,76.124 9.017,76.581
pads on no net: U3.C2 U4.3 U5.3 U5.4
copper on no net:
  other v1: 0.737,65.888

## Polygon pours and split planes (outlines as drawn)
GND on Top Layer "Top Layer-GND 1" (solid, pour order 70): 22.006,86.269 0,86.269 0,60.884 22.022,60.884 22.022,86.269
V_switch on Top Layer "Top Layer-No Net" (solid, shelved, pour order 62): 22.006,73.973 18.491,73.973 16.27,71.753 16.27,68.81 22.006,68.81
GND on Top Layer "Top Layer-GND" (solid, pour order 44): 18.661,52.628 18.661,55.867 3.658,55.867 3.658,59.411 22.006,59.411 22.006,15.806 21.504,13.621 12.295,0.477 11,0.006 9.368,0.859 4.87,7.283 13.803,7.283 13.803,10.522 6.251,10.522 6.251,13.761 18.339,13.761 18.339,17 3.661,17 3.661,20.239 18.661,20.239 18.661,23.478 3.661,23.478 3.661,26.717 18.661,26.717 18.661,29.956 3.661,29.956 3.661,33.195 18.661,33.195 18.661,36.434 3.661,36.434 3.661,39.672 18.661,39.672 18.661,42.911 3.661,42.911 3.661,46.15 18.661,46.15 18.661,49.389 3.661,49.389 3.661,52.628
NetC22_1 on Top Layer "Top Layer-NetC28_1" (solid, pour order 14): 3.661,55.867 18.661,55.867 18.661,52.588 3.661,52.588 3.661,49.389 18.661,49.389 18.661,46.15 3.661,46.15 3.661,42.911 18.661,42.911 18.661,39.672 3.661,39.672 3.661,36.434 18.661,36.434 18.661,33.195 3.661,33.195 3.661,29.956 18.661,29.956 18.661,26.717 3.661,26.717 3.661,23.478 18.661,23.478 18.661,20.239 3.661,20.239 3.661,17 18.339,17 18.339,13.761 6.251,13.761 6.251,10.522 13.803,10.522 13.803,7.283 5.223,7.283 0,14.58 0,59.411 3.661,59.411
GND on Bottom Layer "Bottom Layer-GND" (solid, pour order 72): 22.006,86.269 0,86.269 0,60.833 22.022,60.833 22.022,86.269
VDDS on Bottom Layer "Bottom Layer-VDDS" (solid, pour order 68): 9.982,76.073 ccw(c9.017,76.073) 8.636,76.96 8.636,71.679 9.169,71.145 11.972,71.145 12.146,71.319 11.024,72.441 9.601,72.441 9.271,72.771 9.271,75.362
no net on Bottom Layer "Bottom Layer-No Net" (solid, pour order 66): 8.89,77.394
V_switch on Bottom Layer "Bottom Layer-V_switch" (solid, pour order 64): 19.533,68.859 19.05,68.377 13.868,68.377 10.998,71.247 8.738,71.247 7.518,72.466 7.518,75.768 7.01,76.276 6.402,76.276 6.402,72.744 8.763,70.383 10.643,70.383 13.513,67.513 20.65,67.513 20.65,70.282 20.396,70.536 19.685,70.536 19.533,70.383
NetC22_1 on Bottom Layer "Top Layer-NetC28_1" (solid, pour order 48): 3.661,55.867 18.661,55.867 18.661,52.588 3.661,52.588 3.661,49.389 18.661,49.389 18.661,46.15 3.661,46.15 3.661,42.911 18.661,42.911 18.661,39.672 3.661,39.672 3.661,36.434 18.661,36.434 18.661,33.195 3.661,33.195 3.661,29.956 18.661,29.956 18.661,26.717 3.661,26.717 3.661,23.478 18.661,23.478 18.661,20.239 3.661,20.239 3.661,17 18.339,17 18.339,13.761 6.251,13.761 6.251,10.522 13.803,10.522 13.803,7.283 5.223,7.283 0,14.58 0,59.411 3.661,59.411
GND on Bottom Layer "Top Layer-GND" (solid, pour order 46): 18.661,52.628 18.661,55.867 3.658,55.867 3.658,59.411 22.006,59.411 22.006,15.806 21.504,13.621 12.295,0.477 11,0.006 9.368,0.859 4.87,7.283 13.803,7.283 13.803,10.522 6.251,10.522 6.251,13.761 18.339,13.761 18.339,17 3.661,17 3.661,20.239 18.661,20.239 18.661,23.478 3.661,23.478 3.661,26.717 18.661,26.717 18.661,29.956 3.661,29.956 3.661,33.195 18.661,33.195 18.661,36.434 3.661,36.434 3.661,39.672 18.661,39.672 18.661,42.911 3.661,42.911 3.661,46.15 18.661,46.15 18.661,49.389 3.661,49.389 3.661,52.628

## Keep-outs
Keep-Out Layer:
  lines w0.4: 0,15.85 0,98.55 ; 0.006,15.806 ccw(c5.006,15.806) 0.911,12.938 9.368,0.859 ccw(c11.006,2.006) 12.645,0.859 21.102,12.938 ccw(c17.006,15.806) 22.006,15.806 22.006,98.506 ccw(c20.506,98.506) 20.506,100.006 ; 0.006,98.506 cw(c1.506,98.506) 1.506,100.006 ; 1.506,100.006 20.506,100.006 ; 1.506,100.006 1.506,100.006 ; 20.506,100.006 20.506,100.006

## Silkscreen, mask and mechanical layers (free items; w line width, h text height)
Mechanical 1:
  the board outline again, w0.013